# Altium PCB PCB_PCB_host-rev-2.0_2025-11-25.pcbdoc
Units mm, origin at the board's own origin, x right, y up, seen from the top; angles counter-clockwise.
Board outline 98.8 x 68.04 mm, 6 copper layers (Top Layer, Inner1, Inner2, Inner3, Inner4, Bottom Layer); 85 components, 55 nets, 297 pads, 85 vias.
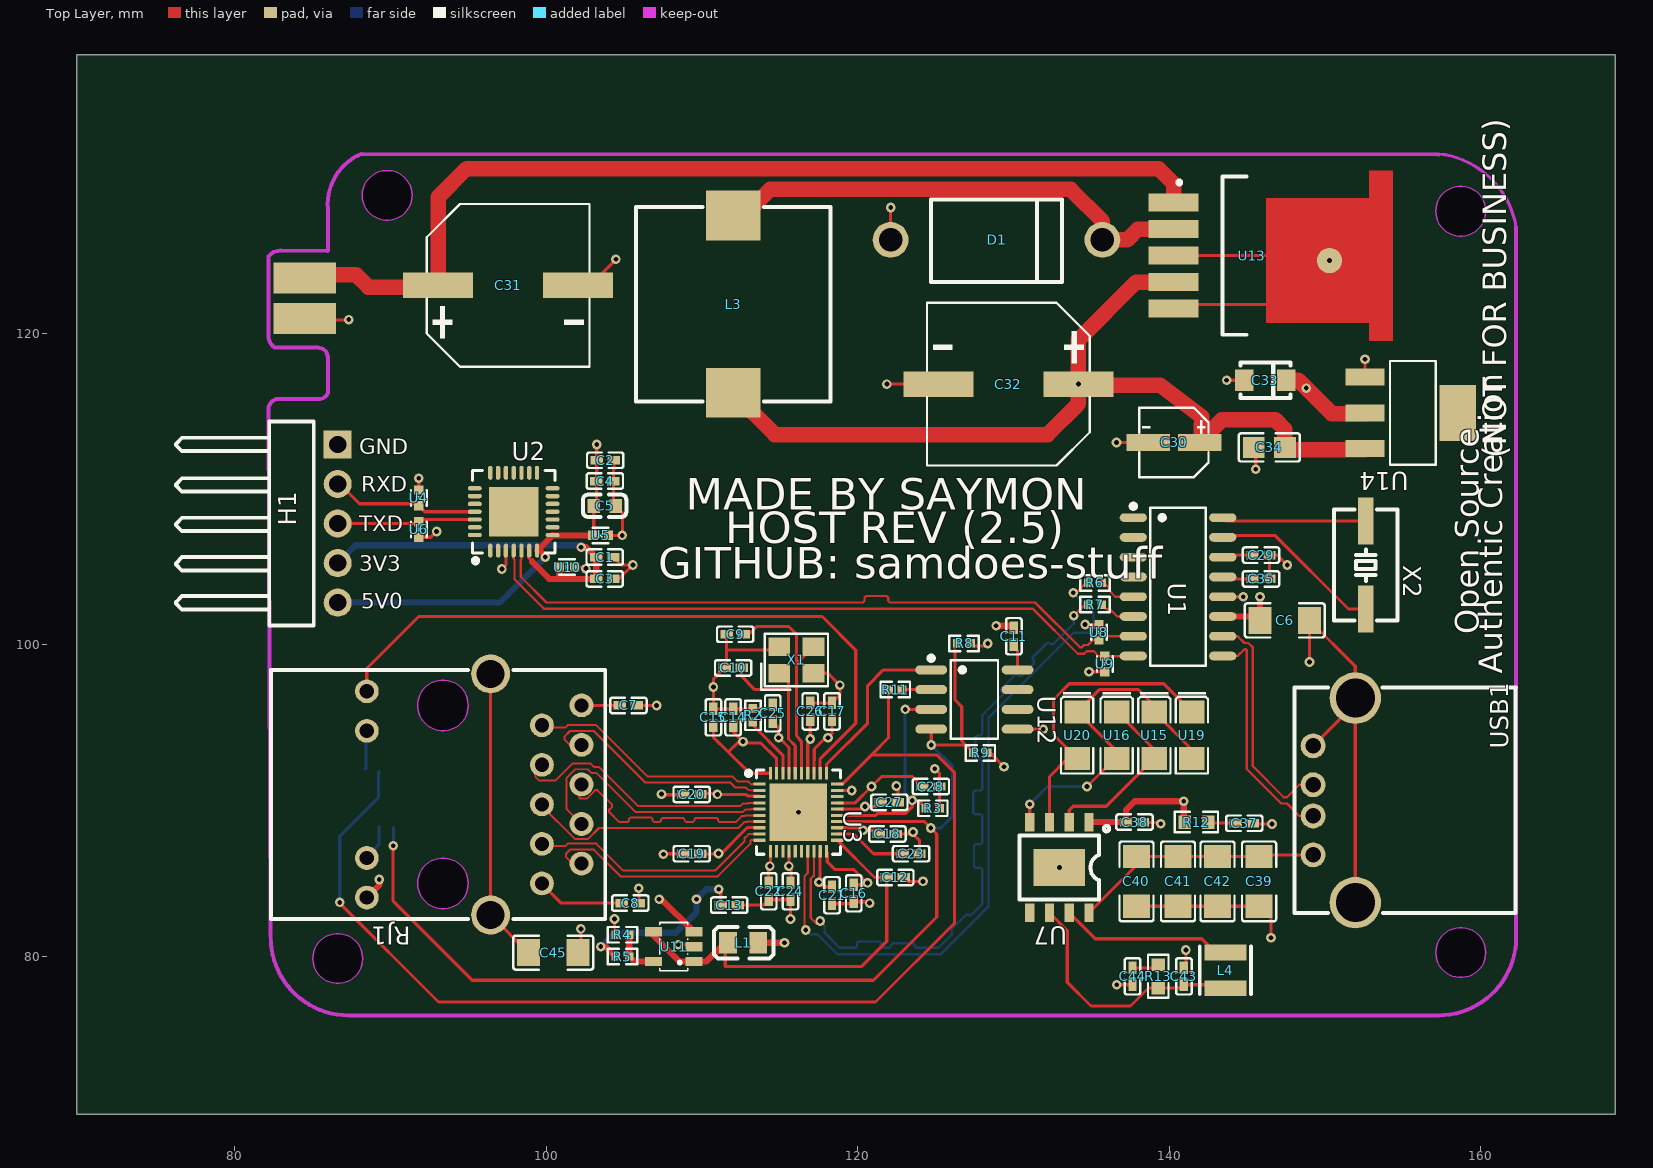
[diagram p0: Top Layer view]
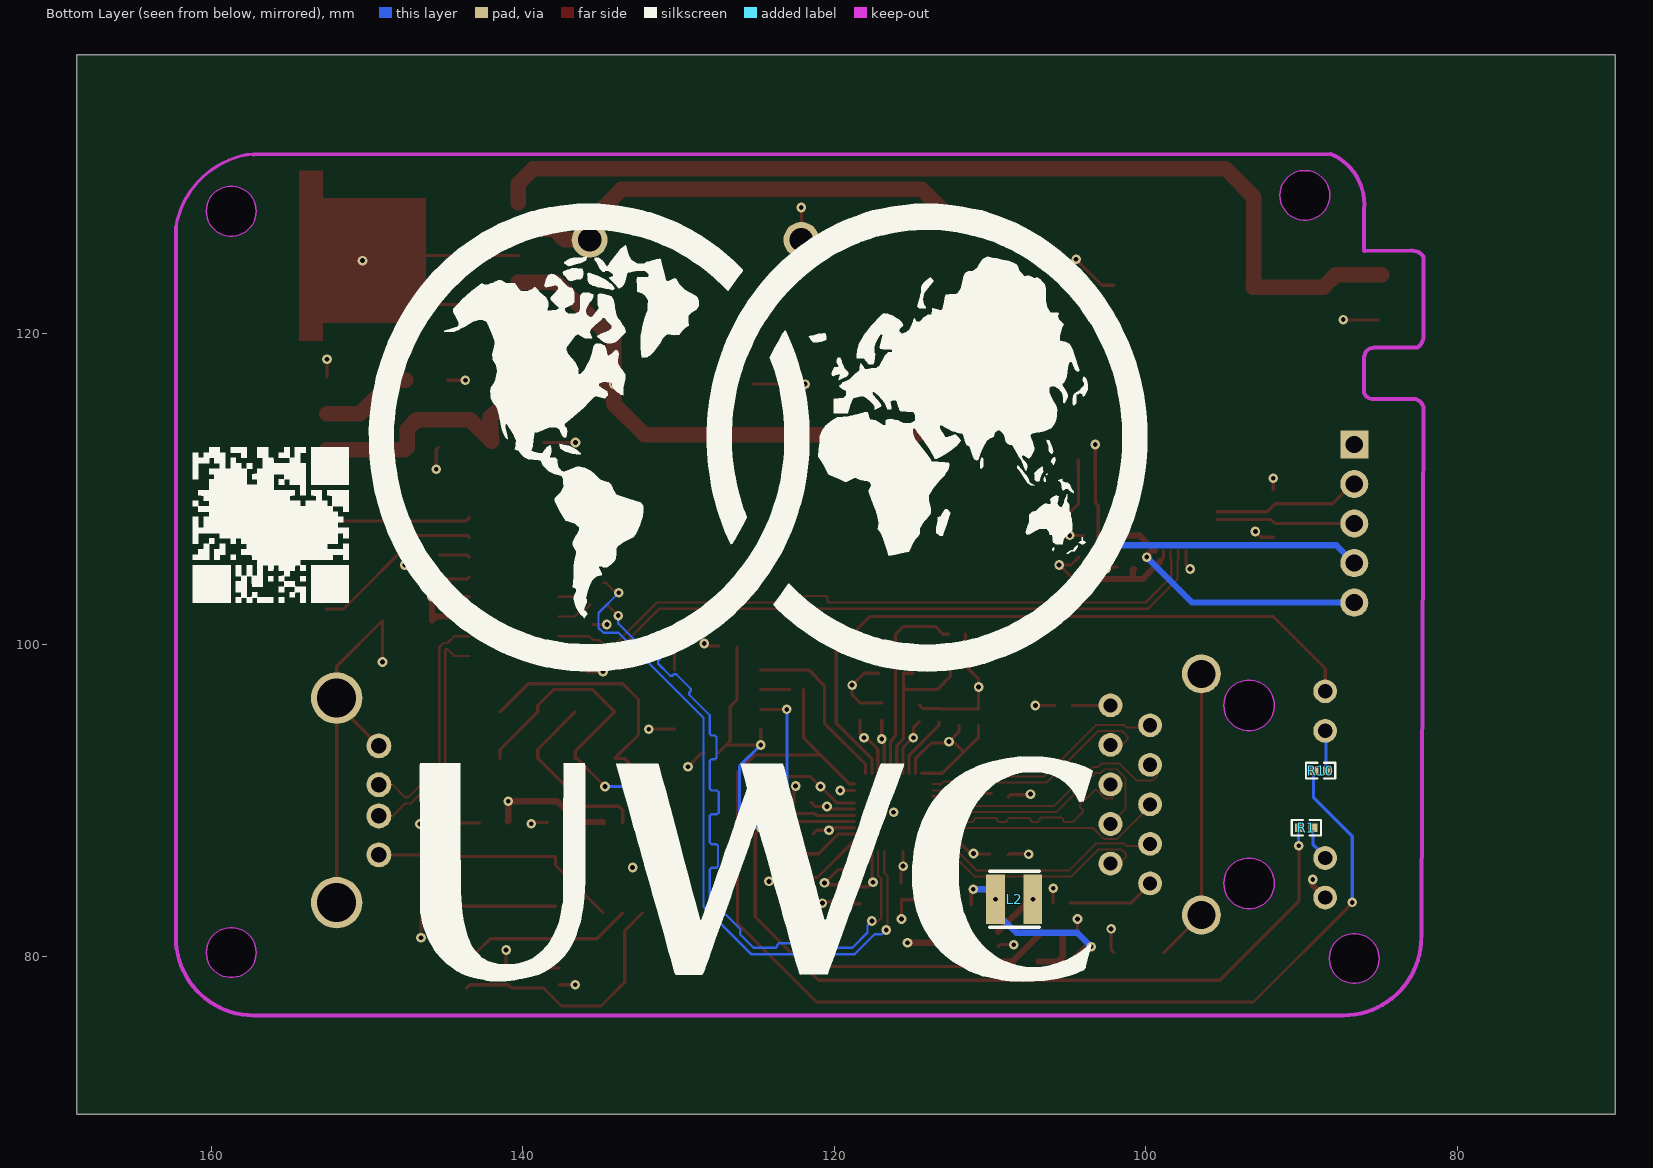
[diagram p1: Bottom Layer view, seen from below]
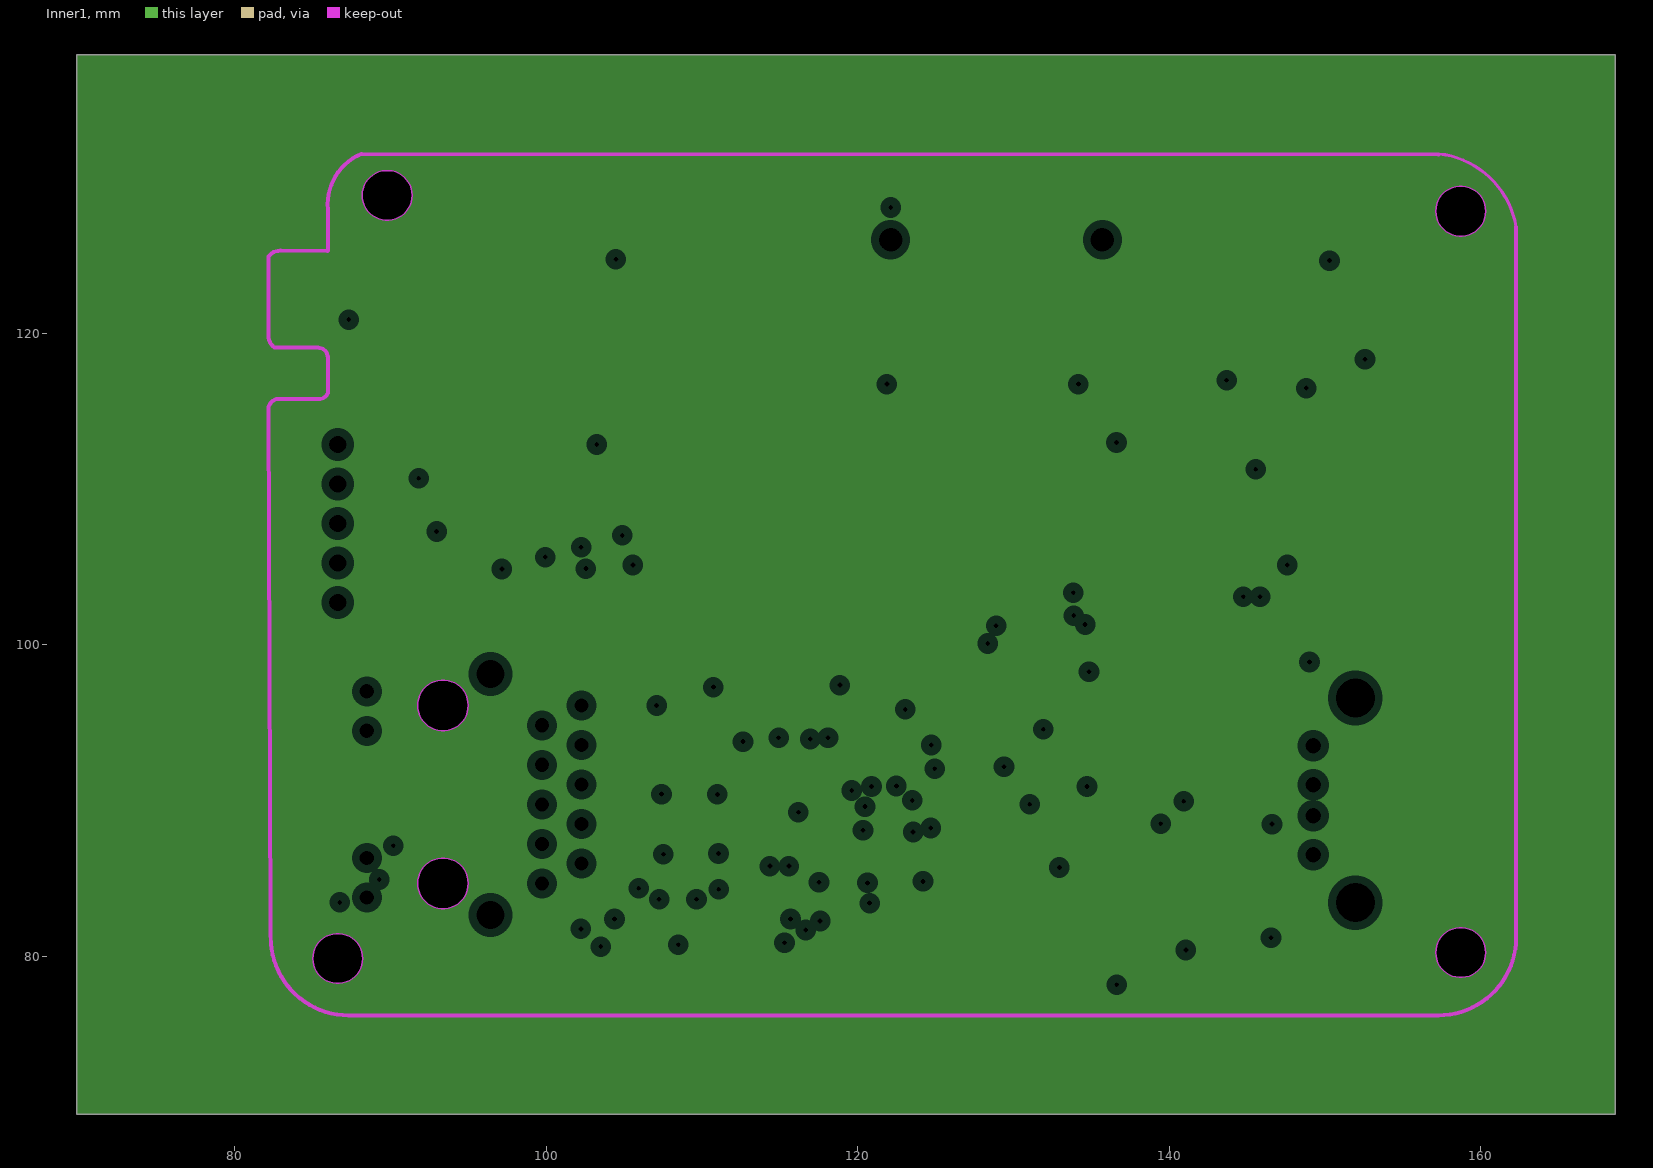
[diagram p2: Inner1, clearances drawn from the general rule]
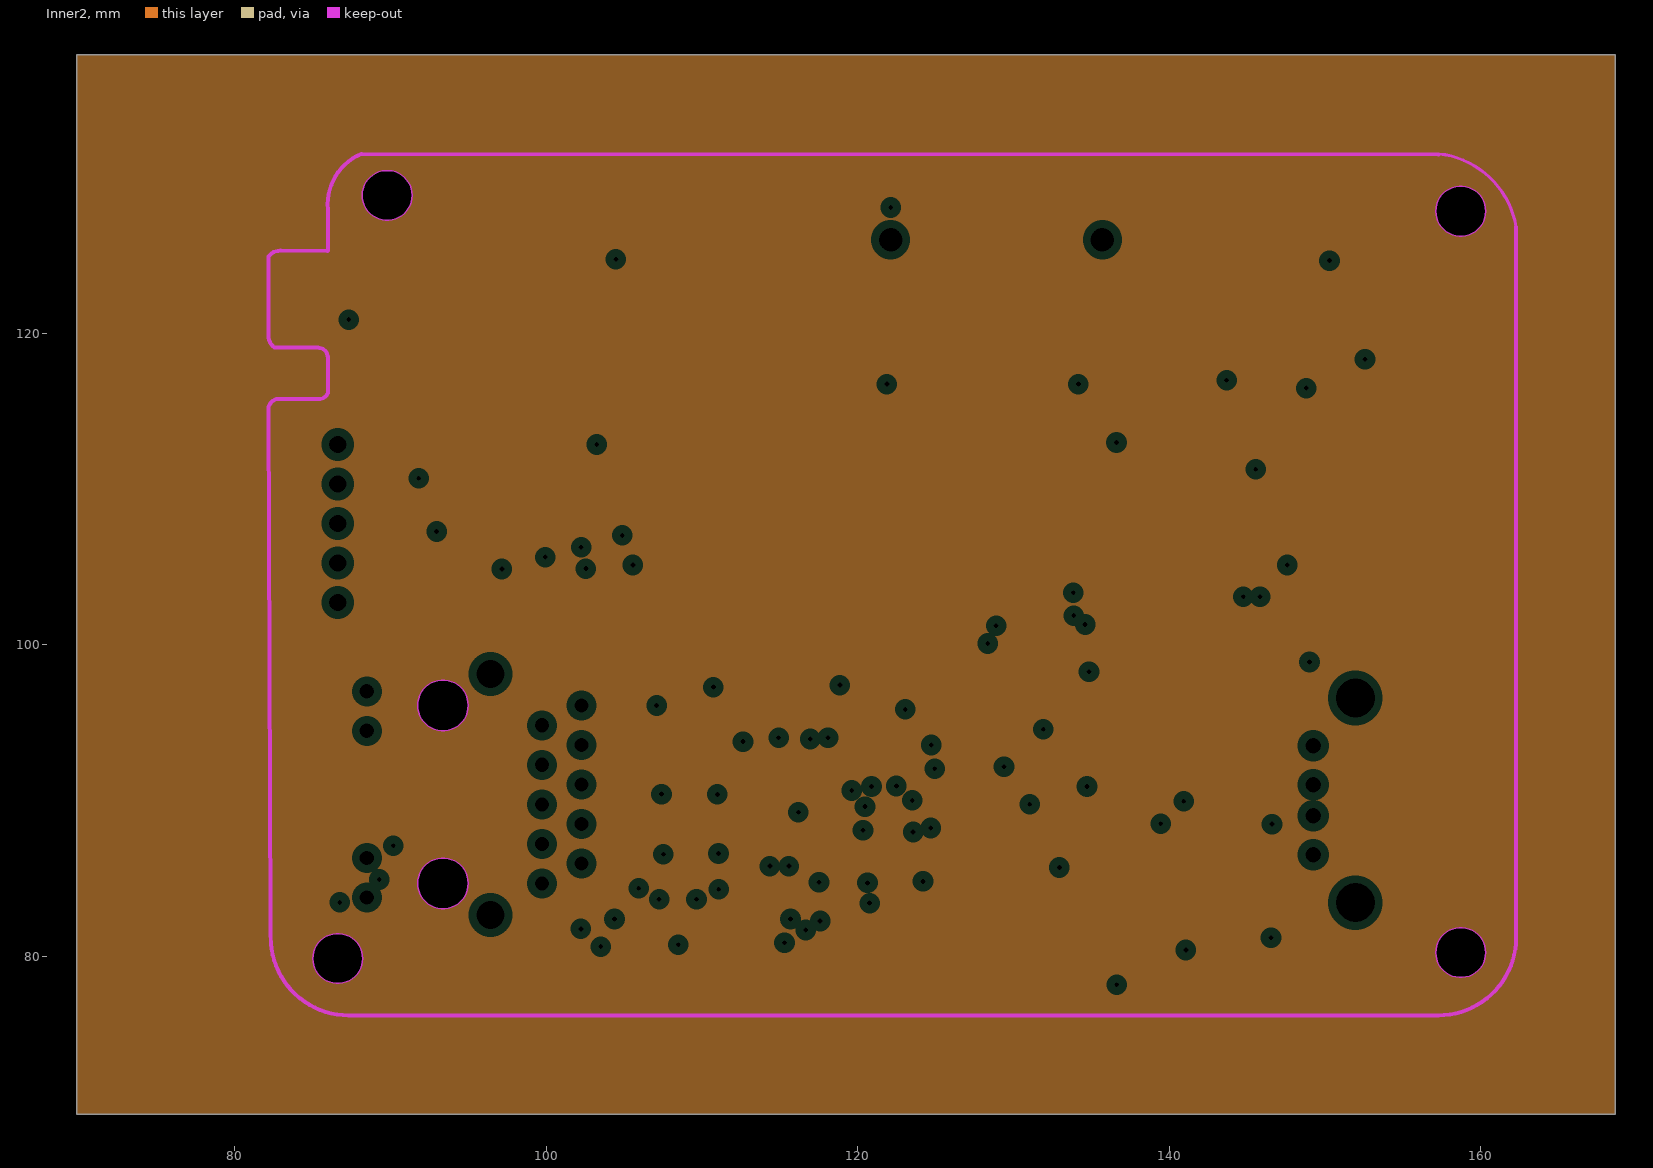
[diagram p3: Inner2, clearances drawn from the general rule]
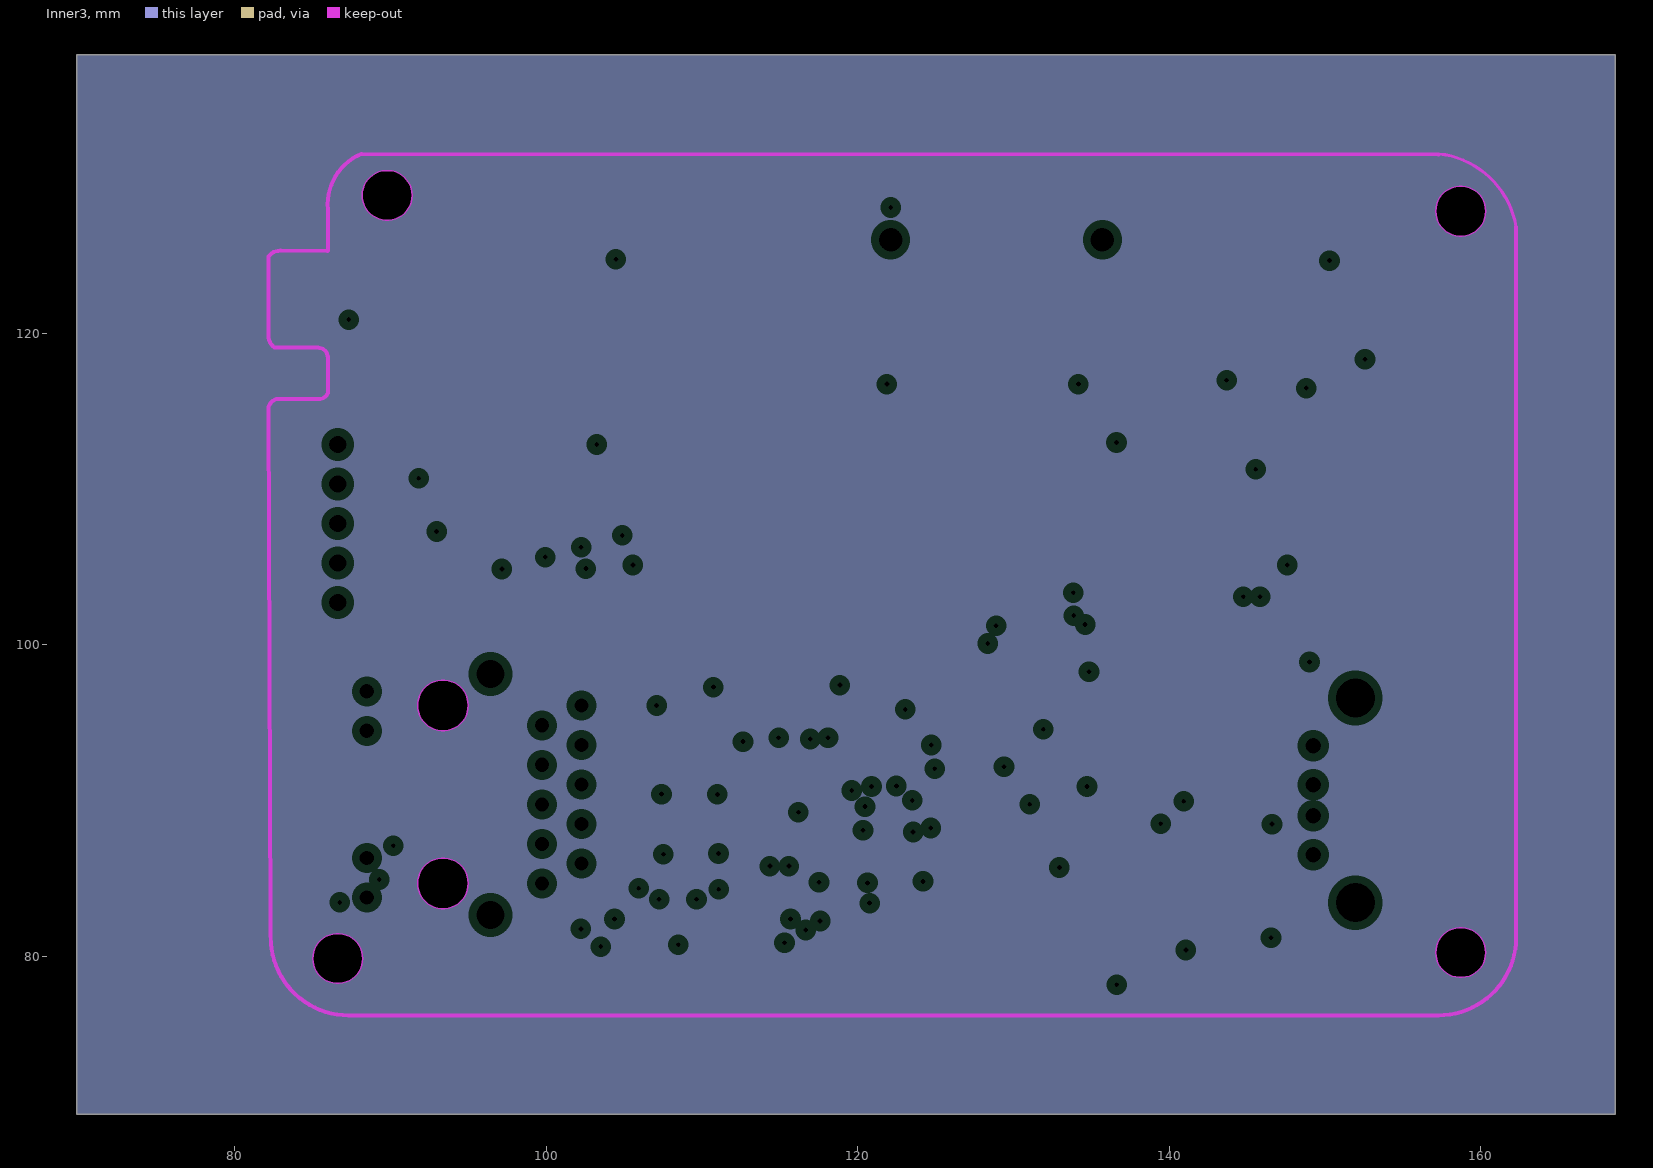
[diagram p4: Inner3, clearances drawn from the general rule]
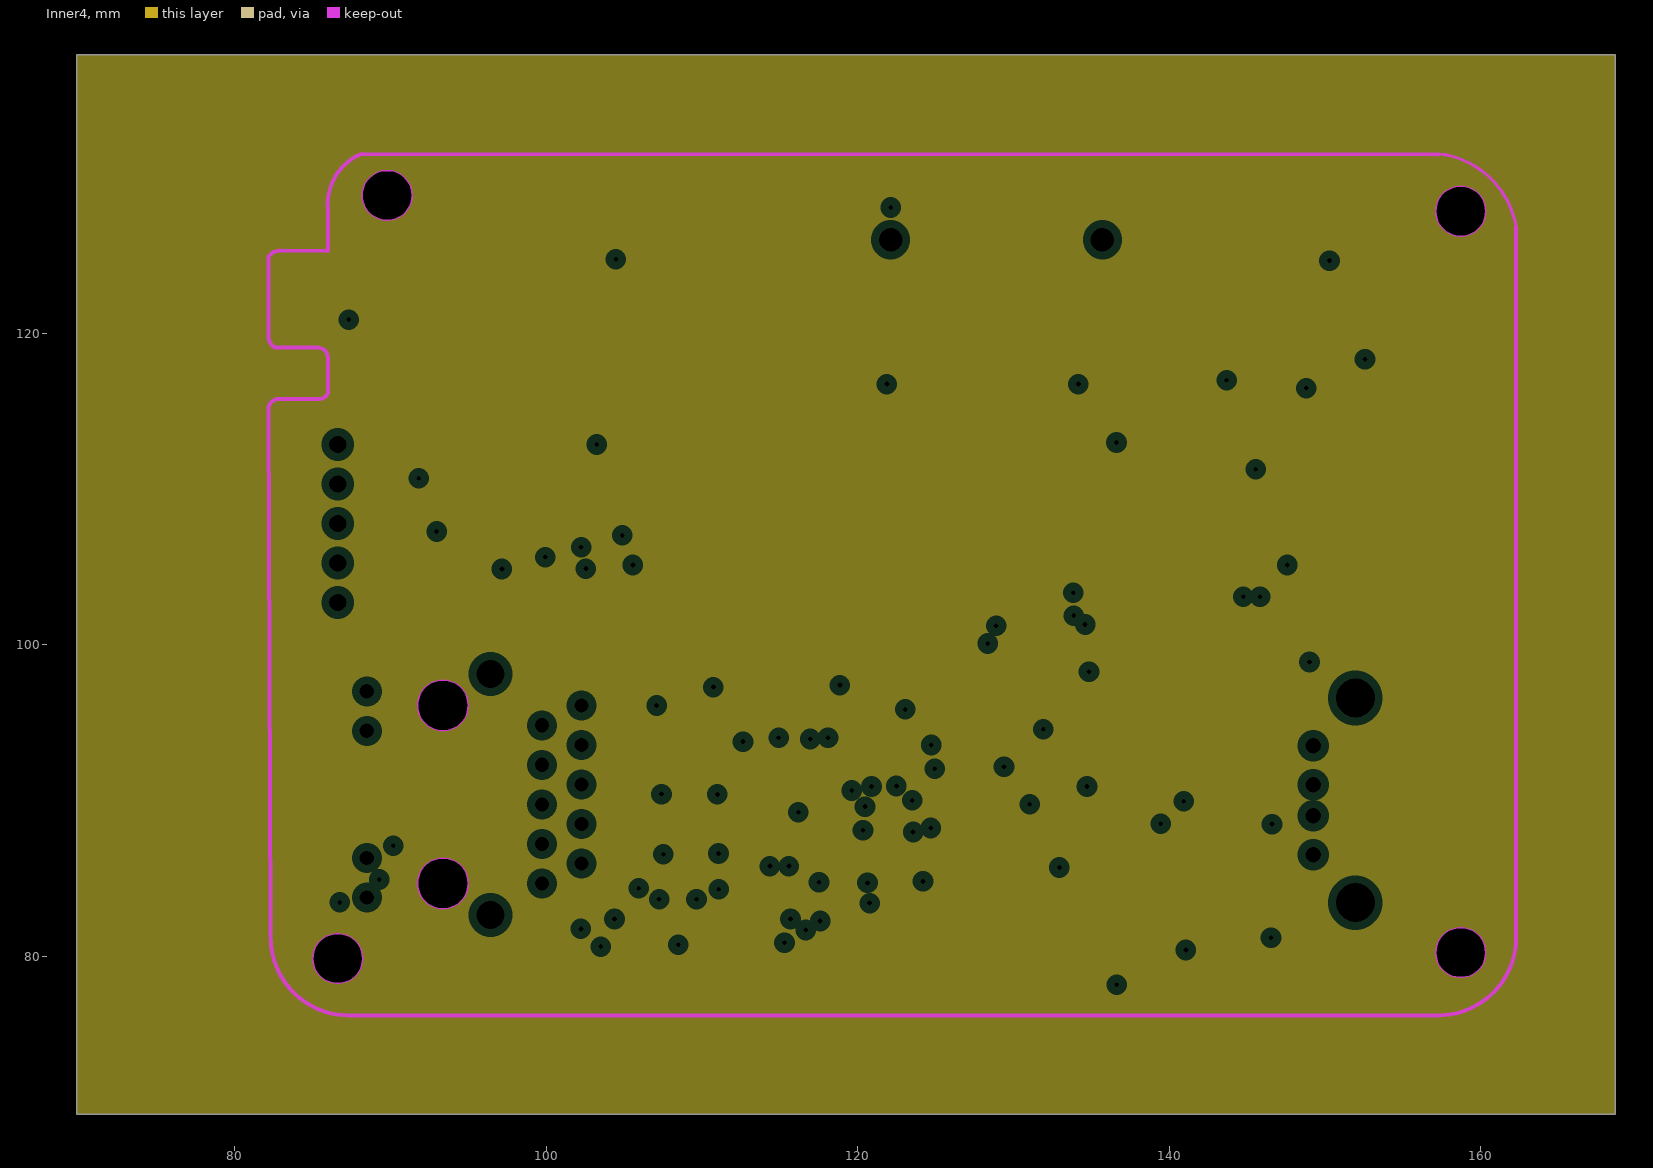
[diagram p5: Inner4, clearances drawn from the general rule]

## Layer stack, top to bottom
Top Layer: signal copper (thickness not stored)
Dielectric: dielectric 0.32, FR-4, Dk 4.8
Inner1: plane copper (thickness not stored)
Dielectric: dielectric 0.32, FR-4, Dk 4.8
Inner2: plane copper (thickness not stored)
Dielectric: dielectric 0.32, FR-4, Dk 4.8
Inner3: plane copper (thickness not stored)
Dielectric: dielectric 0.32, FR-4, Dk 4.8
Inner4: plane copper (thickness not stored)
Dielectric: dielectric 0.32, FR-4, Dk 4.8
Bottom Layer: signal copper (thickness not stored)

## Board outline
168.647,69.85 69.85,69.85 69.85,137.889 168.647,137.889
cut-out: 160.336,80.231 cw(c158.736,80.231) 157.136,80.231 cw(c158.736,80.231)
cut-out: 88.2,79.85 cw(c86.6,79.85) 85,79.85 cw(c86.6,79.85)
cut-out: 91.375,128.872 cw(c89.775,128.872) 88.175,128.872 cw(c89.775,128.872)
cut-out: 160.336,127.856 cw(c158.736,127.856) 157.136,127.856 cw(c158.736,127.856)

## Design rules (kind name [scope] priority, off if disabled: settings)
BoardOutlineClearance Default [All] p0: genericclearance=0.254 ignorepadtopadclearanceinfootprint=FALSE except(0: Region-CutoutEdge Arc-SplitContinuation Track-SplitContinuation SMDPad-SplitContinuation THPad-SplitContinuation Via-SplitContinuation Fill-SplitContinuation Poly-SplitContinuation Region-SplitContinuation Text-SplitContinuation; 0.152: Track-OutlineEdge SMDPad-OutlineEdge THPad-OutlineEdge Via-OutlineEdge Fill-OutlineEdge Region-OutlineEdge Poly-OutlineEdge Text-OutlineEdge Track-CutoutEdge SMDPad-CutoutEdge THPad-CutoutEdge Via-CutoutEdge Fill-CutoutEdge)
Clearance Default [(InNet('U3_17') OR InNet('U3_18') OR InNet('U3_25') OR InNet('U7_4') OR InNet('1.0V') OR InNet('LED2') OR InNet('VBUS') OR InNet('VDD') OR InNet('RJ1_8') OR InNet('RJ1_4') OR InNet('RJ1_9') OR InNet('RJ1_13') OR InNet('RJ1_3') OR InNet('RJ1_2') OR InNet('RJ1_10') OR InNet('U13_1') OR InNet('GND') OR InNet('R12_2') OR InNet('BAT') OR InNet('R13_2') OR InNet('U7_7') OR InNet('USB1_1') OR InNet('U1_6') OR InNet('U1_5') OR InNet('U1_8') OR InNet('U3_22') OR InNet('LED1') OR InNet('U3_31') OR InNet('LED0') OR InNet('U3_38') OR InNet('U3_36') OR InNet('U12_2') OR InNet('RJ1_15') OR InNet('RJ1_1') OR InNet('RJ1_12') OR InNet('RJ1_5') OR InNet('RJ1_7') OR InNet('U3_21') OR InNet('U1_7') OR InNet('U7_2') OR InNet('U7_3') OR InNet('U1_13') OR InNet('U1_14') OR InNet('U1_15') OR InNet('U1_16') OR InNet('U2_26') OR InNet('U2_25') OR InNet('U3_35') OR InNet('RJ1_6') OR InNet('U13_2') OR InNet('U12_8') OR InNet('NETPORT3') OR InNet('U11_5') OR InNet('U1_10') OR InNet('U1_9'))] p1: gap=0.178 ignorepadtopadclearanceinfootprint=FALSE except(0: Region-Region; 0.152: Track-Track Track-SMDPad SMDPad-SMDPad Track-THPad SMDPad-THPad THPad-THPad Track-Via SMDPad-Via THPad-Via Via-Via Track-Fill SMDPad-Fill THPad-Fill Via-Fill Fill-Fill Track-Region SMDPad-Region THPad-Region Via-Region Fill-Region Track-Poly SMDPad-Poly THPad-Poly Via-Poly Fill-Poly Region-Poly Poly-Poly Track-Text SMDPad-Text THPad-Text Via-Text Fill-Text Region-Text Poly-Text Text-Text Track-Sheet SMDPad-Sheet THPad-Sheet Via-Sheet Fill-Sheet Region-Sheet Poly-Sheet Text-Sheet Track-Hole SMDPad-Hole THPad-Hole Via-Hole Fill-Hole Region-Hole Poly-Hole Text-Hole Sheet-Hole)
DiffPairsRouting differentialPair [All] p1: maxuncoupledlength=10 minlimit=9.9606 maxlimit=9.9606 mostfreqgap=9.9606 toplayer_minwidth=5 toplayer_prefwidth=10 toplayer_maxwidth=10 bottomlayer_minwidth=5 bottomlayer_prefwidth=10 bottomlayer_maxwidth=10
PasteMaskExpansion Common [All] p1: expansion=0
PlaneConnect Default [All] p1: planeconnectstyle=Relief reliefexpansion=0.508 reliefentries=4 reliefconductorwidth=0 reliefairgap=0.254
PolygonConnect Default [All] p1: connectstyle=Relief reliefentries=4 reliefconductorwidth=0 polygonreliefangle="90 Angle" airgapwidth=10
RoutingVias Default [All] p1: viastyle="Through Hole" holewidth=12.008 minholewidth=12.008 maxholewidth=2362 width=24.016 minwidth=24.016 maxwidth=3938
SolderMaskExpansion Common [All] p1: useseparateexpansions=TRUE expansion=2 expansionbottom=2
Width Default [All] p1: maxlimit=39 minlimit=5 preferedwidth=8

## Components (designator, comment, footprint, x,y, rotation, side; value= is the part's Value field where it differs from the comment)
C1 "4.7uF" C0402 103.745,105.631 r180 top
C2 "100nF" C0402 103.782,111.854 r0 top
C3 "100nF" C0402 103.745,104.234 r0 top
C4 "1uF" C0402 103.757,110.52 r0 top
C5 "10uF" C0603 103.745,108.933 r0 top
C6 "10uF" C1206 147.433,101.567 r0 top
C7 "100nF" C0402 105.269,96.106 r0 top
C8 "100nF" C0402 105.396,83.406 r0 top
C9 "39pF" C0402 112.127,100.678 r180 top
C10 "39pF" C0402 112,98.519 r180 top
C11 "100nF" C0402 130.034,100.551 r90 top
C12 "2.2uF" C0402 122.414,85.057 r0 top
C13 "2.2uF" C0402 111.746,83.279 r0 top
C14 "100nF" C0402 112,95.344 r90 top
C15 "100nF" C0402 110.73,95.344 r90 top
C16 "100nF" C0402 119.747,84.041 r270 top
C17 "100nF" C0402 118.35,95.725 r90 top
C18 "100nF" C0402 121.906,87.851 r0 top
C19 "100nF" C0402 109.333,86.581 r180 top
C20 "100nF" C0402 109.333,90.391 r180 top
C21 "100nF" C0402 118.35,83.914 r270 top
C22 "100nF" C0402 114.286,84.168 r270 top
C23 "100nF" C0402 123.43,86.581 r0 top
C24 "100nF" C0402 115.683,84.168 r270 top
C25 "100nF" C0402 114.54,95.598 r90 top
C26 "100nF" C0402 116.953,95.725 r90 top
C27 "100nF" C0402 122.033,89.883 r0 top
C28 "1uF" C0402 124.7,90.899 r180 top
C29 "10uF" C0402 145.909,105.758 r180 top
C30 "10uF" CAP-SMD_BD4.0-L4.3-W4.3-LS5.0-FD 140.321,112.997 r180 top
C31 "680uF" CAP-SMD_BD10.0-L10.3-W10.3-LS11.0-FD 97.547,123.094 r0 top
C32 "220uF" CAP-SMD_BD10.0-L10.3-W10.3-FD 129.678,116.744 r180 top
C33 "22uF" CAP-SMD_L3.2-W1.6 146.188,116.998 r180 top
C34 "100nF" C0805 146.442,112.68 r180 top
C35 "10uF" C0402 145.909,104.234 r180 top
C37 "10uF" C0402 144.834,88.539 r180 top
C38 "10uF" C0402 137.781,88.613 r180 top
C39 "22uF" C1206 145.782,84.803 r270 top
C40 "22uF" C1206 137.908,84.803 r270 top
C41 "22uF" C1206 140.575,84.803 r270 top
C42 "22uF" C1206 143.115,84.803 r270 top
C43 "10uF" C0402 140.956,78.707 r270 top
C44 "10uF" C0402 137.654,78.707 r90 top
C45 "1nF" C1206 100.443,80.231 r0 top
D1 "1N5824" DO-27_BD5.3-L8.4-P12.40-D1.3-RD 128.916,126.015 r180 top
H1 "PZ254R-11-05P" HDR-TH_5P-P2.54-H-M-W10.4 86.6,107.79 r270 top
L1 "HCB2012KF-601T20" L0805 112.635,80.866 r180 top
L2 "2.2uH" IND-SMD_L3.0-W3.0_SMNR3015 108.444,83.66 r0 bottom
L3 "33uH" IND-SMD_L12.5-W12.5_SMDRS1275 112,121.887 r270 top
L4 "1uH" IND-SMD_L3.0-W3.0-1 143.623,79.088 r90 top
R1 "1kΩ" R0402 89.677,88.249 r0 bottom
R2 "2.49kΩ" R0402 113.27,95.471 r90 top
R3 "10kΩ" R0402 124.827,89.502 r0 top
R4 "1.1kΩ" R0402 104.888,81.374 r0 top
R5 "1.1kΩ" R0402 104.888,79.977 r180 top
R6 "22Ω" R0402 135.241,103.98 r180 top
R7 "22Ω" R0402 135.241,102.583 r180 top
R8 "10kΩ" R0402 126.833,100.091 r180 top
R9 "10kΩ" R0402 127.875,93.058 r0 top
R10 "1kΩ" R0402 88.759,91.915 r0 bottom
R11 "10kΩ" R0402 122.414,97.122 r180 top
R12 "2Ω" R0603 141.757,88.613 r0 top
R13 "2Ω" R0603 139.305,78.707 r90 top
RJ1 "HC612601A-M893-A" RJ45-TH_HY911130AE 95.363,90.391 r90 top
U1 "SL2.1A" SOP-16_L10.0-W3.9-P1.27-LS6.0-BL 140.575,103.726 r270 top
U2 "CP2102-GMR" WQFN-28_L5.0-W5.0-P0.50-BL-EP3.2 97.903,108.552 r0 top
U3 "RTL8153B-VB-CG" QFN-40_L5.0-W5.0-P0.40-BL-EP3.7 116.191,89.248 r270 top
U4 "TPD1E10B06DPYR" X1SON-2_L1.0-W0.6-P0.65-BI 91.807,109.441 r270 top
U5 "TPD1E10B06DPYR" X1SON-2_L1.0-W0.6-P0.65-BI 103.491,107.028 r180 top
U6 "TPD1E10B06DPYR" X1SON-2_L1.0-W0.6-P0.65-BI 91.807,107.409 r90 top
U7 "IP5306" ESOP-8_L4.9-W3.9-P1.27-LS6.0-BL-EP 132.955,85.692 r180 top
U8 "TPD1E10B06DPYR" X1SON-2_L1.0-W0.6-P0.65-BI 135.495,100.805 r270 top
U9 "TPD1E10B06DPYR" X1SON-2_L1.0-W0.6-P0.65-BI 135.876,98.773 r90 top
U10 "TPD1E10B06DPYR" X1SON-2_L1.0-W0.6-P0.65-BI 101.332,104.996 r180 top
U11 "SY8089AAAC" SOT-23-5_L3.0-W1.7-P0.95-LS2.8-BR 108.19,80.612 r0 top
U12 "93LC46/SN" SOIC-8_L4.9-W3.9-P1.27-LS6.0-BL 127.494,96.487 r270 top
U13 "LM2596SX-5.0/NOPB" TO-263-5_L10.2-W8.9-P1.70-TL 145.299,124.999 r0 top
U14 "AMS1117-3.3" SOT-223-3_L6.5-W3.4-P2.30-LS7.0-BR 155.561,114.902 r180 top
U15 "XL-3216UWC" LED1206-R-RD_WHITE 139.051,94.201 r270 top
U16 "XL-3216UWC" LED1206-R-RD_WHITE 136.638,94.201 r270 top
U19 "XL-3216UWC" LED1206-R-RD_WHITE 141.464,94.201 r270 top
U20 "XL-3216UWC" LED1206-R-RD_WHITE 134.098,94.201 r270 top
USB1 "USB-231-BRW" USB-A-TH_USB-231-ARY 150.608,90.01 r90 top
X1 "25MHz" CRYSTAL-SMD_4P-L3.2-W2.5-BL 116.064,99.027 r0 top
X2 "12MHz" HC-49S_L7.0-W4.0-LS8.0 152.64,105.123 r270 top

## Footprints (in the part's own frame and the unit in brackets; to place one, negate y for a bottom-side part, rotate by r counter-clockwise, add the part's x,y. Pads: shape width x height; smd on the part's side, far side on the other; paste and mask are expansions set on the pad)
C0402 [mm]
  rect 0.79x0.54 smd: 1(-0.545,0) 2(0.545,0)
  silkscreen extent -1.17,-0.5 1.17,0.5
C0603 [mm]
  rect 0.8x0.9 smd: 1(-0.7,0) 2(0.7,0)
  silkscreen extent -1.39,-0.71 1.39,0.71
C0805 [mm]
  rect 1.41x1.35 smd: 1(-1,0) 2(1,0)
  silkscreen extent -1.96,-0.9 1.96,0.9
C1206 [mm]
  rect 1.485x1.728 smd: 1(-1.593,0) 2(1.593,0)
  silkscreen extent -2.56,-1.09 2.56,1.09
CAP-SMD_BD4.0-L4.3-W4.3-LS5.0-FD [mm]
  rect 2.8x1.1 smd: 1(-1.661,0) 2(1.66,0)
  silkscreen extent -2.22,-2.23 2.24,2.23
CAP-SMD_BD10.0-L10.3-W10.3-FD [mm]
  rect 4.5x1.65 smd: 1(-4.5,0) 2(4.5,0)
  silkscreen extent -5.23,-5.23 5.23,5.23
CAP-SMD_BD10.0-L10.3-W10.3-LS11.0-FD [mm]
  rect 4.5x1.65 smd: 1(-4.5,0) 2(4.5,0)
  silkscreen extent -5.23,-5.23 5.23,5.23
CAP-SMD_L3.2-W1.6 [mm]
  rect 1.2x1.4 smd: 1(-1.35,0) 2(1.35,0)
  silkscreen extent -1.6,-1.14 1.6,1.14
CRYSTAL-SMD_4P-L3.2-W2.5-BL [mm]
  rect 1.4x1.2 smd: 1(-1.1,-0.85) 2(1.1,-0.85) 3(1.1,0.85) 4(-1.1,0.85)
  silkscreen extent -2.26,-1.91 2.03,1.68
DO-27_BD5.3-L8.4-P12.40-D1.3-RD [mm]
  round 2.3 hole 1.5 copper offset 0,0: 1(-6.8,0)
  round 2.3 hole 1.5: 2(6.8,0)
  silkscreen extent -4.2,-2.6 4.2,2.7
ESOP-8_L4.9-W3.9-P1.27-LS6.0-BL-EP [mm]
  rect 0.6x1.2 smd: 1(-1.905,-2.908) 2(-0.635,-2.908) 3(0.635,-2.908) 4(1.905,-2.908) 5(1.905,2.908) 6(0.635,2.908) 7(-0.635,2.908) 8(-1.905,2.908)
  rect 3.3x2.4 smd: 9(0,0)
  silkscreen extent -3.2,-2.67 2.55,2.05
HC-49S_L7.0-W4.0-LS8.0 [mm]
  rect 3x1 smd: 1(-2.825,0) 2(2.825,0)
  silkscreen extent -3.56,-2.03 3.56,2.03
HDR-TH_5P-P2.54-H-M-W10.4 [mm]
  rect 1.8x1.8 hole 1.1: 1(-5.08,0)
  round 1.8 hole 1.1: 2(-2.54,0) 3(0,0) 4(2.54,0) 5(5.08,0)
  silkscreen extent -6.55,-10.4 6.55,-1.54
IND-SMD_L3.0-W3.0-1 [mm]
  rect 1x2.7 smd: 1(-1.15,0) 2(1.15,0)
  silkscreen extent -1.52,-1.65 1.52,1.65
IND-SMD_L3.0-W3.0_SMNR3015 [mm]
  rect 1.2x3.2 smd: 1(-1.2,0) 2(1.2,0)
  silkscreen extent -1.62,-1.8 1.58,1.8
IND-SMD_L12.5-W12.5_SMDRS1275 [mm]
  rect 3.2x3.5 smd: 1(-5.7,0) 2(5.7,0)
  silkscreen extent -6.25,-6.25 6.25,6.25
L0805 [mm]
  rect 1.133x1.377 smd: 1(-0.966,0) 2(0.966,0)
  silkscreen extent -1.95,-1.02 1.86,1.02
LED1206-R-RD_WHITE [mm]
  rect 1.485x1.62 smd: 1(1.493,0) 2(-1.493,0)
  silkscreen extent -2.77,-1.04 2.46,1.04
QFN-40_L5.0-W5.0-P0.40-BL-EP3.7 [mm]
  rect 0.2x0.8 smd: 1(-1.8,-2.499) 2(-1.4,-2.499) 3(-1,-2.499) 4(-0.6,-2.499) 5(-0.2,-2.499) 6(0.2,-2.499) 7(0.6,-2.499) 8(1,-2.499) 9(1.4,-2.499) 10(1.8,-2.499) 21(1.8,2.499) 22(1.4,2.499) 23(1,2.499) 24(0.6,2.499) 25(0.2,2.499) 26(-0.2,2.499) 27(-0.6,2.499) 28(-1,2.499) 29(-1.4,2.499) 30(-1.8,2.499)
  rect 0.8x0.2 smd: 11(2.499,-1.8) 12(2.499,-1.4) 13(2.499,-1) 14(2.499,-0.6) 15(2.499,-0.2) 16(2.499,0.2) 17(2.499,0.6) 18(2.499,1) 19(2.499,1.4) 20(2.499,1.8) 31(-2.499,1.8) 32(-2.499,1.4) 33(-2.499,1) 34(-2.499,0.6) 35(-2.499,0.2) 36(-2.499,-0.2) 37(-2.499,-0.6) 38(-2.499,-1) 39(-2.499,-1.4) 40(-2.499,-1.8)
  rect 3.7x3.7 smd: 41(0,0)
  silkscreen extent -2.7,-3.35 2.7,2.7
R0402 [mm]
  rect 0.566x0.54 smd: 1(-0.433,0) 2(0.433,0)
  silkscreen extent -0.94,-0.5 0.94,0.5
R0603 [mm]
  rect 0.806x0.864 smd: 1(-0.753,0) 2(0.753,0)
  silkscreen extent -1.39,-0.66 1.39,0.66
RJ45-TH_HY911130AE [mil]
  round 60 hole 36: 1(225.18,-271.45) 2(174.81,-171.45) 3(125.18,-271.45) 4(74.82,-171.45) 5(25.18,-271.45) 6(-25.19,-171.45) 7(-74.82,-271.45) 8(-125.19,-171.45) 9(-174.83,-271.45) 10(-225.19,-171.45)
  round 60 hole 36 copper offset -0.01,0: 11(260.82,271.45) 14(-260.8,271.45)
  round 60 hole 36 copper offset -0.01,0.01: 12(160.81,271.44)
  round 60 hole 36 copper offset -0.01,-0.01: 13(-160.79,271.46)
  round 98.42 hole 70.87: 15(-304.91,-41.54) 16(304.93,-41.54)
  Board Outline Layer circle w0.2: c-225,79 r63.98
  Board Outline Layer circle w0.2: c225,79 r63.98
  Board Outline Layer region: -225,15.02 -252.76,21.36 -275.02,39.11 -287.37,64.76 -287.37,93.24 -275.02,118.89 -252.76,136.64 -225,142.98 -225,142.98 -197.24,136.64 -174.98,118.89 -162.63,93.24 -162.63,64.76 -174.98,39.11 -197.24,21.36 -225,15.02
  Board Outline Layer region: 225,15.02 197.24,21.36 174.98,39.11 162.63,64.76 162.63,93.24 174.98,118.89 197.24,136.64 225,142.98 225,142.98 252.76,136.64 275.02,118.89 287.37,93.24 287.37,64.76 275.02,39.11 252.76,21.36 225,15.02
  Multi-Layer board cut-out: -225,15.02 -252.76,21.36 -275.02,39.11 -287.37,64.76 -287.37,93.24 -275.02,118.89 -252.76,136.64 -225,142.98 -225,142.98 -197.24,136.64 -174.98,118.89 -162.63,93.24 -162.63,64.76 -174.98,39.11 -197.24,21.36 -225,15.02
  Multi-Layer board cut-out: 225,15.02 197.24,21.36 174.98,39.11 162.63,64.76 162.63,93.24 174.98,118.89 197.24,136.64 225,142.98 225,142.98 252.76,136.64 275.02,118.89 287.37,93.24 287.37,64.76 275.02,39.11 252.76,21.36 225,15.02
  silkscreen extent -315,-332 315,513
SOIC-8_L4.9-W3.9-P1.27-LS6.0-BL [mm]
  oval 0.588x2.045 smd: 1(-1.905,-2.772) 2(-0.635,-2.772) 3(0.635,-2.772) 4(1.905,-2.772) 5(1.905,2.772) 6(0.635,2.772) 7(-0.635,2.772) 8(-1.905,2.772)
  silkscreen extent -2.8,-2.92 2.53,1.52
SOP-16_L10.0-W3.9-P1.27-LS6.0-BL [mm]
  oval 0.56x1.745 smd: 1(-4.445,-2.872) 2(-3.175,-2.872) 3(-1.905,-2.872) 4(-0.635,-2.872) 5(0.635,-2.872) 6(1.905,-2.872) 7(3.175,-2.872) 8(4.445,-2.872) 9(4.445,2.872) 10(3.175,2.872) 11(1.905,2.872) 12(0.635,2.872) 13(-0.635,2.872) 14(-1.905,2.872) 15(-3.175,2.872) 16(-4.445,2.872)
  silkscreen extent -5.33,-3.02 5.08,1.77
SOT-23-5_L3.0-W1.7-P0.95-LS2.8-BR [mm]
  rect 1.1x0.6 smd: 1(1.3,-0.95) 2(1.3,0) 3(1.3,0.95) 4(-1.3,0.95) 5(-1.3,-0.95)
  silkscreen extent -0.9,-1.55 0.9,1.55
SOT-223-3_L6.5-W3.4-P2.30-LS7.0-BR [mm]
  rect 2.5x1.1 smd: 1(2.97,-2.3) 2(2.97,0) 3(2.97,2.3)
  rect 2.34x3.6 smd: 4(-2.97,0)
  silkscreen extent -1.57,-3.33 1.37,3.33
TO-263-5_L10.2-W8.9-P1.70-TL [mm]
  rect 3.2x1.15 smd: 1(-5.008,3.403) 2(-5.008,1.702) 3(-5.008,0) 4(-5.008,-1.702) 5(-5.008,-3.404)
  round 1.626 smd: 6(5.008,-0.318)
  Top Layer region: 0.944,3.683 7.548,3.683 7.548,5.461 9.072,5.461 9.072,-5.461 7.548,-5.461 7.548,-4.317 0.944,-4.317
  silkscreen extent -4.77,-5.08 -0.33,5.08
USB-A-TH_USB-231-ARY [mm]
  round 1.6 hole 1 copper offset 0,0: 1(-3.5,1.355) 4(3.5,1.355)
  round 1.6 hole 1: 2(-1,1.355) 3(1,1.355)
  round 3.3 hole 2.5: 5(-6.57,-1.355) 6(6.57,-1.355)
  silkscreen extent -7.23,-11.68 7.24,2.54
WQFN-28_L5.0-W5.0-P0.50-BL-EP3.2 [mm]
  oval 0.28x0.9 smd: 1(-1.501,-2.5) 2(-1.001,-2.5) 3(-0.501,-2.5) 4(0,-2.5) 5(0.5,-2.5) 6(1.001,-2.5) 7(1.501,-2.5) 15(1.501,2.5) 16(1.001,2.5) 17(0.5,2.5) 18(0,2.5) 19(-0.501,2.5) 20(-1.001,2.5) 21(-1.501,2.5)
  oval 0.9x0.28 smd: 8(2.5,-1.501) 9(2.5,-1.001) 10(2.5,-0.501) 11(2.5,0) 12(2.5,0.5) 13(2.5,1.001) 14(2.5,1.501) 22(-2.5,1.501) 23(-2.5,1.001) 24(-2.5,0.5) 25(-2.5,0) 26(-2.5,-0.501) 27(-2.5,-1.001) 28(-2.5,-1.501)
  rect 3.2x3.2 smd: 29(0,0)
  silkscreen extent -2.65,-3.3 2.65,2.65
X1SON-2_L1.0-W0.6-P0.65-BI [mm]
  rect 0.6x0.6 smd: 1(-0.5,0) 2(0.5,0)
  silkscreen extent -0.5,-0.5 0.5,0.5

## Free pads (board coordinates)
  rect 4x2 smd: 2(84.49,123.567) 3(84.49,120.95)

## Via types
v1: diameter 0.62, hole 0.31, Top Layer to Bottom Layer, 81 vias
v2: diameter 0.61, hole 0.305, Top Layer to Bottom Layer, 4 vias

## Nets (pads, with @x,y where several pads share a name; then routed paths per layer and width w, separated by ;. In a path a pad name is that pad's centre, name@x,y a point inside that pad or via, vN(x,y) a via of type N, cw(c..) or ccw(c..) an arc to the next point about the centre after c; other vN are vias at no path point)
1.0V: C13.1 C19.1 C20.1 C21.1 C24.1 C25.1 C26.1 L2.2 R5.2 U3.3 U3.8 U3.14 U3.19 U3.34 U3.37 | length 32.4
  Top Layer w0.2: C20.1@109.921,90.446 110.845,90.446 v1@110.936,90.355 ; C19.1@109.996,86.563 111.029,86.563 v1@111.058,86.592 ; v1(110.986,90.395) 112.814,90.395 112.913,90.296 113.644,90.296 U3.3 ; v1(111.074,84.295) 111.201,84.168 C13.1 ; v1@111.137,86.487 112.915,88.264 113.675,88.264 U3.8 ; C25.1@114.54,95.053 114.921,94.672 v1(114.921,94.036) 114.959,94.036 115.592,93.403 U3.37 ; v1(115.577,85.783) 115.591,85.797 U3.14 ; C24.1@115.71,84.696 115.71,85.746 v1@115.73,85.766 ; U3.34@116.79,91.747 116.79,93.657 116.953,93.82 v1(116.953,93.947) C26.1@116.953,95.18 ; U3.19@117.591,86.749 117.591,84.825 v1(117.515,84.749) 117.805,84.459 C21.1
  Top Layer w0.4: v1(103.491,80.612) 103.82,80.612 R5.2
  Bottom Layer w0.4: v1(103.491,80.612) 104.38,81.501 108.317,81.501 109.644,82.828 v1(109.644,83.66) 110.279,84.295 v1(111.074,84.295)
  other v1: 111.054,86.597
BAT: C43.2 L4.1 R13.1 U7.6 | length 16.4
  Top Layer w0.2: U7.6 133.463,81.641 133.463,78.326 134.987,76.802 137.527,76.802 138.679,77.954 R13.1 140.748,77.954 C43.2 143.399,78.162 L4.1
GND: C1.1 C2.2 C3.2 C4.2 C5.2 C6.2 C7.2 C8.2 C9.2 C10.2 C12.2 C13.2 C14.2 C15.2 C16.2 C17.2 C18.2 C19.2 C20.2 C21.2 C22.2 C23.2 C24.2 C25.2 C26.2 C27.2 C28.1 C29.1 C30.2 C31.2 C32.2 C33.2 C34.2 C35.1 C37.1 C38.1 C39.2 C40.2 C41.2 C42.2 C43.1 C44.1 C45.2 D1.2 H1.1 pad.3 R2.2 R3.2 R4.1 R9.2 U1.12 U2.3 U3.29 U3.41 U4.1 U5.1 U6.1 U7.9 U8.1 U9.1 U10.1 U11.2 U12.5 U13.3 U13.5 U13.6 U14.1 USB1.4 USB1.5 USB1.6 X1.2 X1.4 | length 142.6
  Top Layer w0.2: pad.3@85.042,120.877 87.283,120.877 v2@87.328,120.833 ; U6.1 92.577,106.909 v1(92.95,107.282) ; U4.1 v1(91.807,110.703) ; v1(97.141,104.869) 97.402,105.13 U2.3 ; U10.1 102.438,104.996 v1(102.538,104.896) ; C45.2 102.221,80.416 v1(102.221,81.755) ; C31.2 102.809,123.094 v2@104.46,124.745 ; U5.1 v1(104.88,107.028) 104.88,108.498 C5.2 104.302,109.076 C4.2 C2.2 ; C3.2 104.671,104.234 v1(105.56,105.123) 104.798,105.123 C1.1 ; v1(104.38,82.39) 104.38,81.449 R4.1 ; C7.2 v1(107.084,96.106) ; C8.2 v1(105.941,84.368) ; v1@107.367,90.37 108.689,90.37 C20.2@108.825,90.234 ; v1@107.514,86.582 108.737,86.582 C19.2@108.855,86.465 ; v1(108.474,80.739) 109.363,80.739 U11.2 ; C9.2 111.582,99.66 ; C13.2 113.942,83.279 C22.2 C24.2 v1(115.683,82.39) ; C25.2@114.54,96.143 114.301,95.904 R2.2 113.255,95.889 112,95.889 110.73,95.889 110.73,97.286 110.73,97.794 C10.2 111.582,98.646 111.582,99.66 ; X1.4 114.747,99.66 111.582,99.66 ; C26.2@116.953,96.27 118.35,96.27 118.858,96.778 v1(118.858,97.413) 118.094,98.177 X1.2 ; C21.2 119.62,83.369 C16.2 120.673,83.496 v1(120.763,83.406) ; U3.29 v1(119.62,90.645) ; D1.2@121.861,126.255 122.1,126.494 v1@122.1,128.093 ; v1(121.876,116.744) C32.2 ; C18.2 v1@123.43,87.851 ; v1(122.487,90.936) 122.578,90.845 C27.2 ; C12.2 123.213,84.803 v1(124.192,84.803) ; v1(123.557,87.978) v1@123.43,87.851 ; C23.2 123.975,87.413 123.537,87.851 v1@123.43,87.851 ; v1(124.954,92.042) 125.245,91.751 C28.1 125.26,90.884 R3.2 ; R9.2 128.51,93.058 v1(129.399,92.169) ; U12.5 v1(131.917,94.582) ; v1(134.606,101.305) U8.1 ; v1(134.86,98.273) U9.1 ; v1(136.629,112.997) C30.2 ; v1(136.638,78.162) C44.1 ; C40.2 C41.2 C42.2 C39.2 146.544,82.448 v1(146.544,81.178) ; C38.1@138.425,88.583 139.37,88.583 v1@139.475,88.477 ; U13.5 140.552,121.856 147.306,121.856 150.132,124.682 v1(150.307,124.682) 149.989,124.999 U13.3 ; C43.1 141.083,79.379 v1(141.083,80.395) ; U1.12 v1(144.766,103.091) ; v1(143.695,116.998) C33.2 ; C37.1@145.437,88.483 146.409,88.483 v1@146.567,88.324 ; C34.2 145.569,112.553 v1(145.569,111.283) ; C35.1 C29.1 146.962,105.758 v1(147.597,105.123) ; v1(149.026,98.9) C6.2 151.963,98.629 USB1.6 ; USB1.4 151.963,96.22 USB1.5 ; U14.1 v1(152.591,118.345)
  other v1: 132.955,85.692 107.518,86.552 139.47,88.505 146.615,88.486 116.191,89.248 107.401,90.411 110.73,97.286 122.118,128.096
  other v2: 87.307,120.891 104.47,124.768
LED0: RJ1.11 U3.32 | length 44
  Top Layer w0.2: RJ1.11@88.467,97.015 88.467,98.481 91.807,101.821 117.715,101.821 119.874,99.662 119.874,94.963 117.588,92.677 U3.32@117.588,91.747
LED1: R10.2 R11.2 U3.30 | length 76.8
  Top Layer w0.2: v2@86.727,83.406 93.077,77.056 121.144,77.056 126.224,82.136 126.224,91.788 125.081,92.931 120.909,92.931 ; U3.30 119.008,91.049 120.9,92.941 121.981,94.022 R11.2
  Bottom Layer w0.2: v2(86.729,83.45) 86.729,87.696 89.209,90.176 89.209,91.796 R10.2@89.285,91.871
LED2: R1.2 R8.2 R9.1 U3.24 U12.4 | length 72.9
  Top Layer w0.2: v2@90.156,87.14 90.156,83.533 95.236,78.453 121.017,78.453 125.081,82.517 125.081,87.851 v1(124.696,88.236) 124.283,88.649 U3.24 ; U12.4 v1(124.722,93.566) 126.934,93.566 ; R8.2@126.253,99.855 126.253,96.462 126.692,96.023 ; 126.68,95.979 126.68,93.82 126.934,93.566 ; R9.1 126.934,93.566
  Bottom Layer w0.2: R1.2@90.165,88.262 90.171,88.255 v2(90.171,87.086) ; v1(124.696,88.236) 125.338,88.235 126.097,88.994 126.097,92.189 v1@124.72,93.566
NETPORT3: L2.1 U11.3 | length 3.1
  Top Layer w0.4: v1(107.244,83.66) 107.392,83.66 U11.3
R12_2: C37.2 R12.2 | length 1.5
  Top Layer w0.2: R12.2@142.779,88.542 144.249,88.542 C37.2@144.283,88.509
R13_2: C44.2 R13.2 | length 1.7
  Top Layer w0.2: C44.2 139.097,79.252 R13.2
RJ1_1: C7.1 RJ1.1 | length 2.5
  Top Layer w0.2: RJ1.1 C7.1@104.723,96.106
RJ1_2: RJ1.2 U3.1 | length 15.7
  Top Layer w0.127: RJ1.2 99.862,94.687 101.205,94.687 101.361,94.843 103.192,94.843 106.5,91.535 111.982,91.535 112.307,91.21 112.983,91.21 113.155,91.038 113.218,91.038 113.228,91.048 U3.1
RJ1_3: RJ1.3 U3.2 | length 15.7
  Top Layer w0.127: RJ1.3@102.261,93.579 101.5,93.579 101.155,93.923 101.155,94.1 101.519,94.463 103.034,94.463 106.343,91.155 111.825,91.155 112.15,90.83 112.825,90.83 112.997,90.658 113.218,90.658 113.228,90.648 U3.2
RJ1_4: RJ1.4 U3.4 | length 17.1
  Top Layer w0.127: RJ1.4@99.725,92.304 99.313,91.892 99.313,91.497 99.517,91.293 100.601,91.293 101.696,92.388 102.82,92.388 103.054,92.155 103.376,92.155 105.874,89.656 112.479,89.656 112.639,89.816 112.975,89.816 112.997,89.838 113.218,89.838 113.228,89.848 U3.4
RJ1_5: RJ1.5 U3.6 | length 15.3
  Top Layer w0.127: RJ1.5@102.245,91.057 102.115,90.926 102.115,90.16 102.139,90.136 102.614,90.136 103.146,90.668 103.273,90.668 104.224,89.717 104.224,89.59 104.024,89.391 104.024,89.264 104.675,88.613 105.217,88.613 105.307,88.703 105.307,88.814 105.397,88.904 106.741,88.904 106.831,88.814 106.831,88.703 106.921,88.613 107.276,88.613 107.366,88.703 107.366,88.777 107.456,88.867 108.8,88.867 108.89,88.777 108.89,88.703 108.98,88.613 109.415,88.613 109.504,88.703 109.504,88.786 109.594,88.876 110.939,88.876 111.028,88.786 111.028,88.703 111.118,88.613 112.159,88.613 112.543,88.997 112.752,88.997 112.793,89.038 113.218,89.038 113.228,89.048 U3.6
RJ1_6: RJ1.6 U3.7 | length 15.4
  Top Layer w0.127: RJ1.6 99.718,89.648 101.853,87.513 102.663,87.513 103.383,88.233 112.317,88.233 112.701,88.617 112.91,88.617 112.951,88.658 113.218,88.658 113.228,88.648 U3.7
RJ1_7: RJ1.7 U3.5 | length 17.2
  Top Layer w0.127: RJ1.7 101.28,89.468 101.28,91.435 101.853,92.008 102.663,92.008 102.896,91.775 103.218,91.775 105.717,89.276 112.637,89.276 112.797,89.436 113.133,89.436 113.155,89.458 113.218,89.458 113.228,89.448 U3.5
RJ1_8: RJ1.8 U3.9 | length 15.9
  Top Layer w0.127: RJ1.8 99.862,87.067 101.205,87.067 101.361,87.223 103.21,87.223 104.919,85.513 110.864,85.513 112.73,87.378 112.73,87.57 112.997,87.838 113.218,87.838 113.228,87.848 U3.9
RJ1_9: RJ1.9 U3.10 | length 15.7
  Top Layer w0.127: RJ1.9@102.267,85.952 101.675,85.952 101.272,86.355 101.272,86.597 101.519,86.843 103.052,86.843 104.762,85.133 111.022,85.133 113.11,87.221 113.11,87.413 113.155,87.458 113.218,87.458 113.228,87.448 U3.10
RJ1_10: C8.1 RJ1.10 | length 5.7
  Top Layer w0.2: RJ1.10 99.718,84.639 100.951,83.406 C8.1
RJ1_12: R10.1 RJ1.12 | length 2.2
  Bottom Layer w0.2: R10.1@88.377,92.04 88.422,92.085 RJ1.12@88.422,94.244
RJ1_13: R1.1 RJ1.13 | length 2.1
  Bottom Layer w0.2: RJ1.13@88.582,86.503 89.26,87.181 R1.1@89.26,88.322
RJ1_15: C45.1 RJ1.15 RJ1.16 | length 18.9
  Top Layer w0.2: RJ1.16 RJ1.15 98.833,80.231 C45.1
U1_5: R6.1 U1.5 | length 2.5
  Top Layer w0.147: R6.1 135.82,103.98 136.138,103.662 136.138,103.5 136.546,103.091 U1.5
U1_6: R7.1 U1.6 | length 2.3
  Top Layer w0.147: R7.1 135.977,102.28 136.214,102.28 136.673,101.821 U1.6
U1_7: U1.7 U2.5 U8.2 | length 43.8
  Top Layer w0.147: U2.5 98.403,105.517 98.353,105.467 98.353,104.375 100.002,102.725 120.334,102.725 120.438,102.829 120.438,103.035 120.542,103.139 121.858,103.139 121.962,103.035 121.962,102.829 122.066,102.725 131.392,102.725 134.294,99.823 134.378,99.823 134.543,99.989 134.794,99.989 135.11,100.305 U8.2 135.741,100.551 U1.7
U1_8: U1.8 U2.4 U9.2 | length 43.8
  Top Layer w0.147: U2.4 97.903,105.517 97.953,105.467 97.953,104.209 99.837,102.325 131.226,102.325 134.128,99.423 134.543,99.423 134.709,99.589 135.175,99.589 135.491,99.273 U9.2 137.695,99.273 U1.8
U1_9: U1.9 USB1.2 | length 14.9
  Top Layer w0.147: U1.9 144.405,99.281 144.84,99.716 144.925,99.716 144.985,99.656 144.985,92.028 147.203,89.81 147.568,89.81 148.368,89.01 USB1.2
U1_10: U1.10 USB1.3 | length 14.9
  Top Layer w0.147: U1.10 144.405,100.551 144.84,100.116 145.091,100.116 145.385,99.822 145.385,92.193 147.369,90.21 147.568,90.21 148.368,91.01 USB1.3
U1_13: C35.2 U1.13 | length 2
  Top Layer w0.2: U1.13 143.574,104.234 C35.2
U1_14: C29.2 U1.14 | length 2
  Top Layer w0.2: U1.14 143.574,105.758 C29.2
U1_15: U1.15 X2.2 | length 11.2
  Top Layer w0.2: U1.15 143.574,107.028 146.798,107.028 151.528,102.298 X2.2
U1_16: U1.16 X2.1 | length 9.3
  Top Layer w0.2: U1.16 143.67,107.948 X2.1
U2_25: H1.2 U2.25 U4.2 | length 9.5
  Top Layer w0.2: H1.2 86.727,110.33 87.997,109.06 91.688,109.06 U4.2 92.196,108.552 U2.25
U2_26: H1.3 U2.26 U6.2 | length 8.9
  Top Layer w0.2: H1.3 91.688,107.79 U6.2 91.949,108.051 U2.26
U3_17: R6.2 U3.17 | length 44.1
  Top Layer w0.147: v1(116.662,81.685) 116.579,81.768 116.579,85.137 116.791,85.348 U3.17 ; v1(133.844,103.345) 133.854,103.335 134.018,103.335 134.662,103.98 R6.2
  Bottom Layer w0.147: v1(116.662,81.685) 116.941,81.406 117.41,81.406 118.683,80.133 125.345,80.133 128.397,83.185 128.397,95.31 133.856,100.769 134.828,100.769 135.141,101.083 135.141,102.048 v1(133.844,103.345)
U3_18: R7.2 U3.18 | length 44.1
  Top Layer w0.147: U3.18 117.191,85.182 116.979,84.971 116.979,82.46 117.327,82.113 117.438,82.113 v1(117.588,82.263) ; v1(133.883,101.877) 134.477,102.47 R7.2@134.693,102.47
  Bottom Layer w0.147: v1(117.588,82.263) 117.867,81.984 117.867,81.515 118.849,80.533 119.851,80.533 119.955,80.637 119.955,80.843 120.059,80.947 121.375,80.947 121.479,80.843 121.479,80.637 121.583,80.533 122.037,80.533 122.14,80.637 122.14,80.722 122.244,80.826 123.561,80.826 123.664,80.722 123.664,80.637 123.768,80.533 125.179,80.533 126.057,81.41 126.057,81.557 126.024,81.59 126.024,81.737 126.955,82.668 127.102,82.668 127.134,82.635 127.281,82.635 127.997,83.35 127.997,85.568 127.893,85.672 127.573,85.672 127.469,85.776 127.469,87.092 127.573,87.196 127.893,87.196 127.997,87.3 127.997,89.013 127.893,89.117 127.531,89.117 127.427,89.221 127.427,90.537 127.531,90.641 127.893,90.641 127.997,90.745 127.997,92.547 127.893,92.651 127.673,92.651 127.569,92.755 127.569,94.071 127.673,94.175 127.893,94.175 127.997,94.279 127.997,95.476 129.316,96.795 129.316,96.942 129.227,97.031 129.227,97.178 130.157,98.109 130.304,98.109 130.393,98.02 130.54,98.02 131.327,98.806 131.327,98.953 131.235,99.045 131.235,99.192 132.166,100.123 132.313,100.123 132.405,100.031 132.552,100.031 133.883,101.363 v1(133.883,101.877)
U3_21: C12.1 L1.2 U3.21 U11.1 U11.4 | length 27.2
  Top Layer w0.2: L1.2 111.492,80.688 111.492,79.342 120.255,79.342 121.868,80.955 C12.1@121.868,85.057 ; U3.21 121.081,85.057 C12.1
  Top Layer w0.4: U11.4@106.636,81.562 108.536,79.662 U11.1 110.288,79.662 111.492,80.866 L1.2
U3_22: C23.1 U3.22 | length 4.7
  Top Layer w0.2: U3.22 119.747,87.851 120.89,86.708 121.017,86.581 121.144,86.581 C23.1@122.884,86.581
U3_25: R3.1 U3.25 U12.3 | length 14.3
  Top Layer w0.2: U3.25 121.151,89.048 121.278,89.175 123.088,89.175 123.505,89.593 v1(123.505,90.01) 123.886,90.01 R3.1 ; v1(123.049,95.852) U12.3
  Bottom Layer w0.2: v1(123.049,95.852) 123.049,90.466 v1(123.505,90.01)
U3_31: U3.31 U12.1 | length 11.2
  Top Layer w0.2: U3.31 117.991,92.318 120.636,94.963 120.636,97.376 121.652,98.392 U12.1
U3_35: C9.1 U3.35 X1.3 | length 14.4
  Top Layer w0.2: C9.1 113.016,100.678 113.524,101.186 115.556,101.186 116.064,100.678 116.064,98.777 ; U3.35 116.392,93.767 116.064,94.201 116.064,98.777 ; X1.3@117.164,99.877 116.064,98.777
U3_36: C10.1 U3.36 X1.1 | length 11.2
  Top Layer w0.2: C10.1 112.545,97.974 113.397,97.122 115.379,97.122 115.556,97.299 ; X1.1 115.556,98.177 115.556,93.947 115.991,93.512 U3.36
U3_38: R2.1 U3.38 | length 4.1
  Top Layer w0.2: R2.1 113.27,94.836 115.191,92.915 U3.38
U7_2: U7.2 U15.1 U16.2 | length 11.6
  Top Layer w0.2: U7.2 133.59,89.375 133.844,89.629 135.971,89.629 U15.1 139.051,93.281 U16.2
U7_3: U7.3 U19.2 U20.1 | length 19.7
  Top Layer w0.2: U7.3 132.32,91.534 133.494,92.709 U20.1 132.574,94.233 132.574,96.487 133.59,97.503 139.655,97.503 U19.2
U7_4: U7.4 U15.2 U16.1 U19.1 U20.2 | length 22.4
  Top Layer w0.2: U7.4 v1(131.05,89.756) ; U20.2 136.638,93.154 U16.1 136.543,92.709 v1(134.733,90.899) ; U20.2 135.525,97.122 138.035,97.122 139.051,96.106 U15.2 ; U15.2 141.464,93.281 U19.1
  Bottom Layer w0.2: v1(131.05,89.756) 132.193,90.899 v1(134.733,90.899)
U7_7: L4.2 U7.7 | length 11.1
  Top Layer w0.2: U7.7 135.254,81.12 142.099,81.12 142.981,80.238 L4.2
U11_5: R4.2 R5.1 U11.5 | length 3.1
  Top Layer w0.4: R4.2 R5.1 105.636,79.662 U11.5
U12_2: R11.1 U12.2 | length 1.9
  Top Layer w0.2: R11.1 U12.2
U12_8: C11.1 U12.8 | length 1.7
  Top Layer w0.2: C11.1 130.034,99.875 130.268,99.642 U12.8
U13_1: C31.1 pad.2 U13.1 | length 63.8
  Top Layer w1: pad.2@84.842,123.763 87.792,123.763 88.572,122.983 C31.1@93.082,122.983 ; C31.1@93.046,123.094 93.046,128.753 94.88,130.587 139.33,130.587 140.29,129.627 U13.1@140.29,128.403
U13_2: D1.1 L3.1 U13.2 | length 31.3
  Top Layer w1: L3.1 112.709,127.587 114.375,129.253 133.679,129.253 135.716,127.216 135.716,126.015 137.314,126.015 138,126.701 U13.2
USB1_1: C39.1 C40.1 C41.1 C42.1 U7.8 USB1.1 | length 16.3
  Top Layer w0.2: U7.8 137.908,85.832 C40.1 C41.1 C42.1 C39.1 145.896,86.51 USB1.1
VBUS: C2.1 C4.1 C5.1 C6.1 C28.2 C30.1 C32.1 C34.1 C38.2 H1.5 L1.1 L3.2 R8.1 R12.1 U1.11 U2.7 U2.8 U3.27 U5.2 U7.1 U13.4 U14.3 | length 105.5
  Top Layer w0.2: U5.2 103.045,107.082 C5.1 103.212,109.1 C4.1 103.237,110.545 103.237,111.854 v1(103.237,112.87) ; U3.27 119.839,89.848 v1(120.89,90.899) 121.525,91.534 123.52,91.534 C28.2 ; R8.1@127.413,99.93 128.174,99.93 v1@128.362,100.119 ; U7.1 U7.1@135,88.74
  Top Layer w0.4: U2.7 U2.8 ; U2.7@99.5,106.148 99.935,105.713 v1(99.935,105.631) ; U2.8@100.443,107.028 U5.2@103.031,107.005 ; L1.1 v1(115.302,80.866) ; U7.1 C38.2@137.235,88.613 ; C38.2@137.236,88.674 137.236,89.395 137.791,89.949 v1(140.943,89.949) 140.943,88.676 R12.1@140.97,88.649 ; U1.11 145.586,101.821 C6.1 v1(145.84,103.091)
  Top Layer w1: L3.2 114.682,113.505 132.193,113.505 134.178,115.49 v1(134.178,116.744) 134.178,119.593 137.882,123.297 U13.4 ; C32.1@134.225,116.68 139.432,116.68 142.099,114.648 C30.1@142.053,113.117 ; C30.1@142.007,113.071 C30.1@142.053,113.117 ; U14.3@152.616,112.539 147.583,112.539 C34.1 147.442,113.839 146.823,114.458 143.394,114.458 C30.1@142.053,113.117
  Bottom Layer w0.4: H1.5 97.014,102.71 v1(99.935,105.631)
  other v1: 128.354,100.083
VDD: C1.2 C3.1 C11.2 C14.1 C15.1 C16.1 C17.1 C18.1 C22.1 C27.1 C33.1 H1.4 RJ1.14 U2.6 U3.11 U3.20 U3.23 U3.26 U3.33 U3.39 U3.40 U10.2 U14.2 | length 61.1
  Top Layer w0.2: U2.6@98.861,106.035 98.861,105.58 99.048,105.392 ; C15.1 110.73,94.074 111.691,93.112 ; C14.1@112,94.799 112,94.418 v1(112.635,93.783) ; C22.1@114.273,84.746 114.273,85.711 v1@114.308,85.746 ; v1@114.391,85.818 U3.11 ; U3.40 113.057,91.747 111.691,93.112 ; U3.39 114.791,92.68 113.778,93.693 112.889,93.693 112.799,93.783 v1(112.635,93.783) ; U3.33 117.207,93.312 117.931,94.036 v1(118.096,94.036) 118.35,94.29 C17.1@118.35,95.18 ; U3.20@118.044,86.67 118.044,86.067 118.553,85.558 119.764,85.558 v1@120.652,84.67 ; U3.23 120.183,88.248 v1(120.345,88.087) 121.125,88.087 C18.1 ; U3.26 120.31,89.448 v1(120.472,89.61) 121.215,89.61 C27.1 ; C16.1 v1@120.509,84.586 ; 111.691,93.112 112.362,93.783 v1(112.635,93.783)
  Top Layer w0.4: RJ1.14 89.267,84.565 v1(89.267,84.93) ; 99.085,105.366 99.085,105.338 100.189,104.234 100.835,104.234 C3.1 C1.2 102.565,106.266 v1(102.231,106.266) ; U10.2@100.759,104.869 100.835,104.794 100.835,104.236 ; v1(128.891,101.223) 129.907,101.223 C11.2@130.034,101.096
  Top Layer w1: C33.1 148.3,116.998 v1(148.808,116.49) 150.459,114.839 U14.2@152.616,114.839
  Bottom Layer w0.4: H1.4 87.743,106.393 102.104,106.393 v1(102.231,106.266)
  other v1: 120.633,84.71 114.356,85.783
pads on no net: U1.1 U1.2 U1.3 U1.4 U2.1 U2.2 U2.9 U2.10 U2.11 U2.12 U2.13 U2.14 U2.15 U2.16 U2.17 U2.18 U2.19 U2.20 U2.21 U2.22 U2.23 U2.24 U2.27 U2.28 U2.29 U3.12 U3.13 U3.15 U3.16 U3.28 U7.5 U12.6 U12.7 U14.4

## Keep-outs
Board Outline Layer:
  circle w0.025: c158.736,80.231 r1.6
  region: 160.336,80.231 cw(c158.736,80.231) 157.136,80.231 cw(c158.736,80.231)
  circle w0.025: c86.6,79.85 r1.6
  region: 88.2,79.85 cw(c86.6,79.85) 85,79.85 cw(c86.6,79.85)
  circle w0.025: c89.775,128.872 r1.6
  region: 91.375,128.872 cw(c89.775,128.872) 88.175,128.872 cw(c89.775,128.872)
  circle w0.025: c158.736,127.856 r1.6
  region: 160.336,127.856 cw(c158.736,127.856) 157.136,127.856 cw(c158.736,127.856)
  lines w0.2: 157.339,131.539 cw(c156.701,125.906) 162.292,126.84
  lines w0.254: 82.282,81.247 82.282,82.263 ; 82.282,82.136 82.155,115.283 cw(c82.914,115.031) 82.663,115.791 85.457,115.791 ccw(c85.402,116.394) 85.965,116.172 85.965,118.522 ; 82.297,81.2 ccw(c87.297,81.2) 87.297,76.2 157.297,76.2 ccw(c157.297,81.2) 162.297,81.2 162.292,126.84 ; 85.956,125.296 82.917,125.316 ccw(c82.872,124.453) 82.155,124.935 82.155,119.728 ccw(c83.13,119.881) 82.536,119.093 85.33,119.093 cw(c85.315,118.443) 85.965,118.458 ; 85.965,125.316 85.985,127.974 ; 85.965,127.983 cw(c89.483,128.281) 88.124,131.539 157.322,131.499

## Silkscreen, mask and mechanical layers (free items; w line width, h text height)
Top Silkscreen Layer:
  text "GND" at 87.997,112.235 h1
  text "(NOT FOR BUSINESS)" at 161.657,111.981 h1.5 r90
  text "RXD" at 88.124,109.822 h1
  text "MADE BY SAYMON" at 108.952,108.679 h2.03
  text "TXD" at 87.997,107.282 h1
  text "HOST REV (2.5)" at 111.492,106.52 h2.03
  text "3V3" at 87.997,104.742 h1
  text "GITHUB: samdoes-stuff" at 107.174,104.234 h2.03
  text "5V0" at 88.124,102.329 h1
  text "Open Source" at 159.879,100.678 h1.5 r90
  text "Authentic Creation" at 161.403,98.138 h1.5 r90
Bottom Silkscreen Layer:
  drawing of 44 lines, arcs and shapes, not listed
Mechanical Layer:
  circle w0.025: c158.736,80.231 r1.6
  circle w0.025: c86.6,79.85 r1.6
  circle w0.025: c89.775,128.872 r1.6
  circle w0.025: c158.736,127.856 r1.6